# Altium PCB FPGA-Oscilloscope-route-01.PcbDoc (part 3 of 4)
Units mil, origin at the board's own origin, x right, y up, seen from the top; angles counter-clockwise.
Board outline 8300 x 5800 mil, 2 copper layers (Top Layer, Bottom Layer); 257 components, 397 nets, 1971 pads, 530 vias.
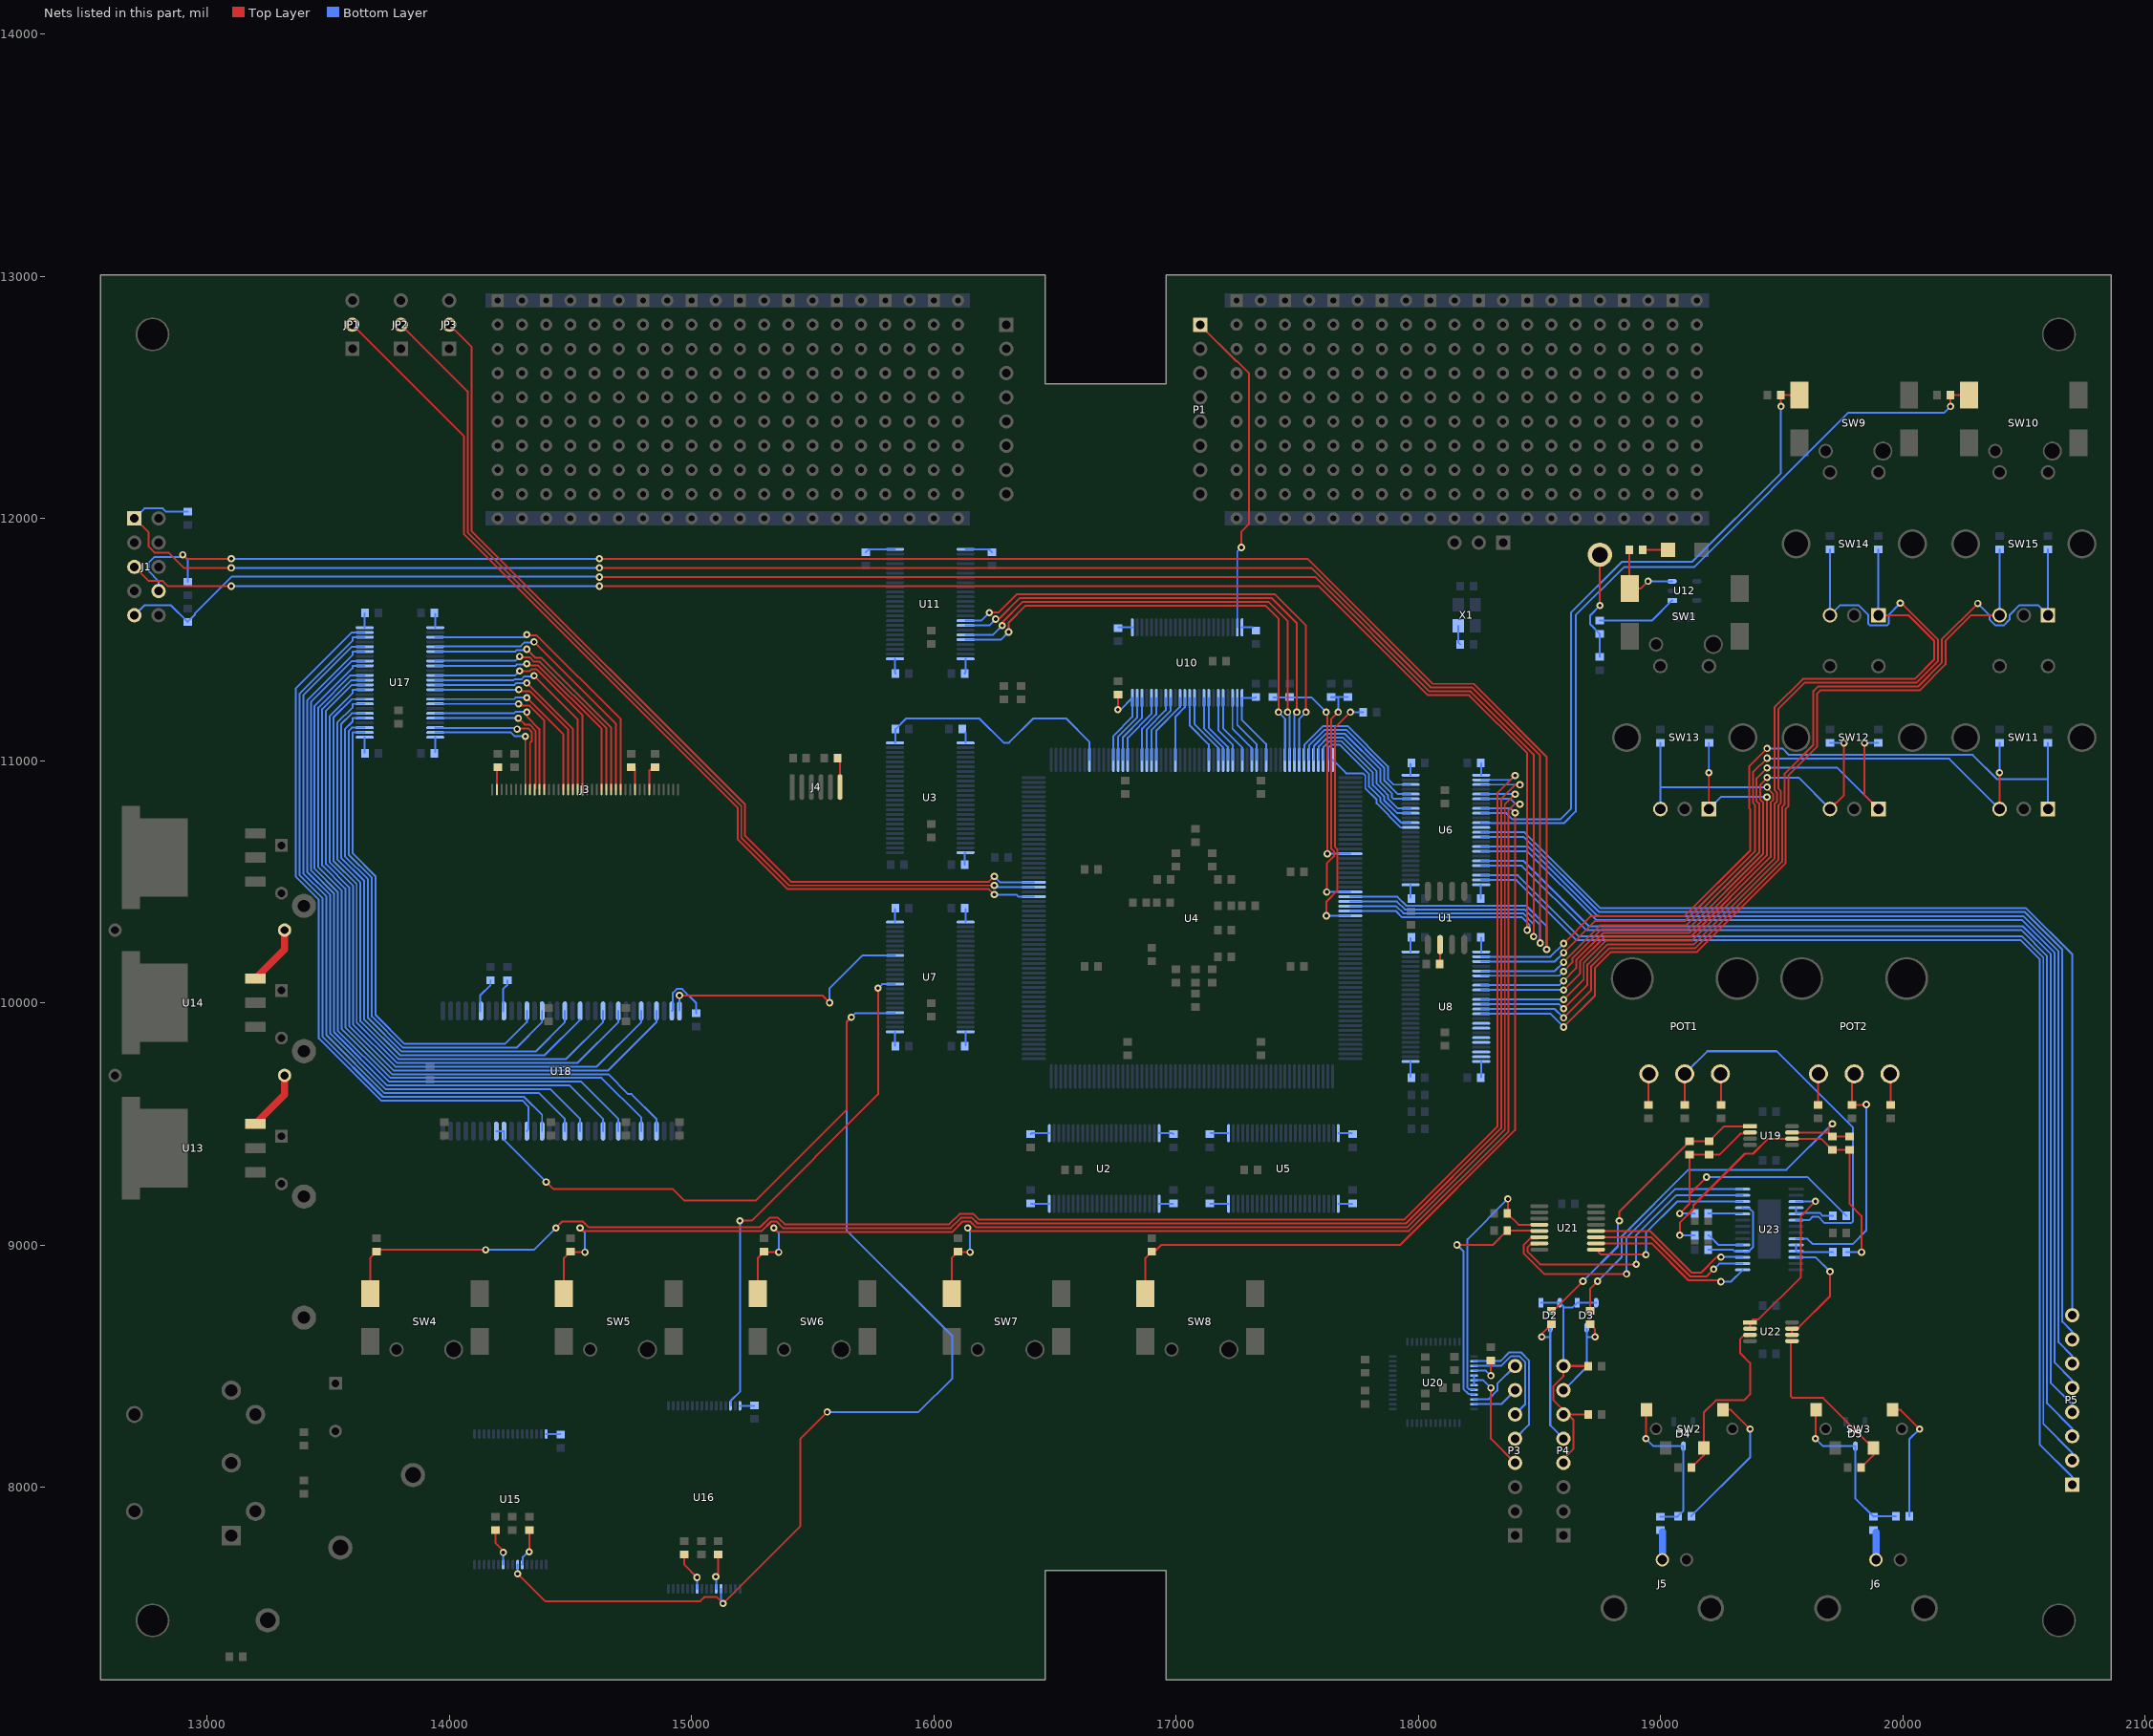
[diagram p3: the nets of this part, all layers, seen from the top]

## Via types
v1: diameter 30, hole 15, Top Layer to Bottom Layer, 530 vias

## Nets (pads, with @x,y where several pads share a name; then routed paths per layer and width w, separated by ;. In a path a pad name is that pad's centre, name@x,y a point inside that pad or via, vN(x,y) a via of type N, cw(c..) or ccw(c..) an arc to the next point about the centre after c; other vN are vias at no path point) (continued)
IO189: R14.2 U3.24 U4.189 | length 1079.3
  Bottom Layer w7.8: U3.24@15840,11077.57 U3.24@15840,11072.76 15842.44,11075.2 R14.2@15842.44,11130 15886.17,11173.73 16188.51,11173.73 16288.94,11073.3 16311.06,11073.3 16411.49,11173.73 16546.27,11173.73 16643.23,11076.77 U4.189@16643.23,11002.83
IO194: R42.2 U4.194 U10.48 | length 430.9
  Top Layer w7.8: v1(16760,11210) R42.2@16760,11272.44
  Bottom Layer w7.8: U4.194@16741.65,11002.83 16741.65,11101.65 16820,11180 U10.48@16820,11258.66 16771.34,11210 v1(16760,11210)
IO195: U4.195 U10.47 | length 288.3
  Bottom Layer w7.8: U4.195@16761.34,11002.83 16761.34,11099.28 16839.68,11177.62 U10.47@16839.68,11258.66
IO196: U4.196 U10.46 | length 288.3
  Bottom Layer w7.8: U4.196@16781.02,11002.83 16781.02,11096.9 16859.37,11175.25 U10.46@16859.37,11258.66
IO197: U4.197 U10.44 | length 296.4
  Bottom Layer w7.8: U4.197@16800.71,11002.83 16800.71,11094.52 16898.74,11192.55 U10.44@16898.74,11258.66
IO200: U4.200 U10.43 | length 280.1
  Bottom Layer w7.8: U4.200@16859.76,11002.83 16859.76,11131.52 16918.42,11190.18 U10.43@16918.42,11258.66
IO201: U4.201 U10.41 | length 288.3
  Bottom Layer w7.8: U4.201@16879.45,11002.83 16879.45,11129.14 16957.79,11207.49 U10.41@16957.79,11258.66
IO202: U4.202 U10.40 | length 288.3
  Bottom Layer w7.8: U4.202@16899.13,11002.83 16899.13,11126.76 16977.48,11205.11 U10.40@16977.48,11258.66
IO203: U4.203 U10.38 | length 296.4
  Bottom Layer w7.8: U4.203@16918.82,11002.83 16918.82,11123.92 17016.85,11221.95 U10.38@17016.85,11258.66
IO207: U4.207 U10.37 | length 272
  Bottom Layer w7.8: U4.207@16997.56,11002.83 16997.56,11180.6 17036.53,11219.58 U10.37@17036.53,11258.66
IO214: U4.214 U10.36 | length 288.6
  Bottom Layer w7.8: U10.36@17056.22,11258.66 17056.22,11146.15 17135.36,11067.01 U4.214@17135.36,11002.83
IO216: U4.216 U10.35 | length 296.8
  Bottom Layer w7.8: U10.35@17075.9,11258.66 17075.9,11150.96 17174.73,11052.14 U4.216@17174.73,11002.83
IO217: U4.217 U10.33 | length 288.6
  Bottom Layer w7.8: U10.33@17115.27,11258.66 17115.27,11133.65 17194.41,11054.52 U4.217@17194.41,11002.83
IO218: U4.218 U10.32 | length 288.6
  Bottom Layer w7.8: U10.32@17134.96,11258.66 17134.96,11136.03 17214.1,11056.89 U4.218@17214.1,11002.83
IO219: U4.219 U10.30 | length 280.5
  Bottom Layer w7.8: U10.30@17174.33,11258.66 17174.33,11125.67 17233.78,11066.22 U4.219@17233.78,11002.83
IO221: U4.221 U10.29 | length 288.6
  Bottom Layer w7.8: U10.29@17194.01,11258.66 17194.01,11133.46 17273.15,11054.32 U4.221@17273.15,11002.83
IO223: U4.223 U10.27 | length 288.6
  Bottom Layer w7.8: U10.27@17233.38,11258.66 17233.38,11131.28 17312.52,11052.14 U4.223@17312.52,11002.83
IO224: U4.224 U10.26 | length 288.6
  Bottom Layer w7.8: U10.26@17253.07,11258.66 17253.07,11146.93 17332.21,11067.79 U4.224@17332.21,11002.84
IO226: R43.2 U4.226 U10.25 | length 355.6
  Bottom Layer w7.8: R43.2@17330,11262.44 17326.22,11258.66 U10.25@17272.75,11258.66 17272.75,11167.25 17371.58,11068.42 U4.226@17371.58,11002.83
IO230: U4.230 U11.44 | length 1990.1
  Top Layer w8: v1(16309.21,11530.79) 16309.28,11530.86 16309.28,11569.28 16380,11640 17370,11640 17423.14,11586.86 v1(17423.14,11200)
  Bottom Layer w8: U11.44@16131.34,11498.74 16277.17,11498.74 v1(16309.21,11530.79) ; v1(17423.14,11200) 17423.14,11199.9 17450.32,11172.73 U4.230@17450.32,11002.83
IO231: U4.231 U11.43 | length 2004.5
  Top Layer w8: v1(16282.48,11557.52) 16282.48,11570.32 16367.96,11655.8 17382.04,11655.8 17460.94,11576.89 v1(17460.94,11200)
  Bottom Layer w8: U11.43@16131.34,11518.42 16243.39,11518.42 v1(16282.48,11557.52) ; v1(17460.94,11200) 17470,11190.94 U4.231@17470,11002.83
IO232: U4.232 U11.41 | length 2025.8
  Top Layer w8: v1(16255.76,11584.24) 16268.57,11584.24 16355.92,11671.6 17394.08,11671.6 17498.74,11566.93 v1(17498.74,11200)
  Bottom Layer w8: U11.41@16131.34,11557.8 16229.31,11557.8 v1(16255.76,11584.24) ; U4.232@17489.69,11002.83 17489.69,11190.94 v1(17498.74,11200)
IO233: U4.233 U11.40 | length 2070.2
  Top Layer w8: v1(16229.03,11610.97) 16229.1,11611.04 16267.53,11611.04 16343.88,11687.4 17406.12,11687.4 17536.54,11556.97 v1(17536.54,11200)
  Bottom Layer w8: U11.40@16131.34,11577.48 16195.54,11577.48 v1(16229.03,11610.97) ; U4.233@17509.37,11002.83 17509.37,11172.73 17536.54,11199.9 v1(17536.54,11200)
IO234: U4.234 U6.46 | length 663.9
  Bottom Layer w7.8: U4.234@17529.06,11002.83 17531.14,11004.91 17531.14,11066.11 17607.57,11142.53 17708.83,11142.53 17875.3,10976.06 17875.3,10924.14 17898.81,10900.63 U6.46@17968.66,10900.63
IO235: U4.235 U6.44 | length 646.2
  Bottom Layer w7.8: U4.235@17548.74,11002.83 17550.82,11004.91 17550.82,11063.73 17614.03,11126.93 17702.37,11126.93 17859.7,10969.6 17859.7,10917.68 17916.12,10861.26 U6.44@17968.66,10861.26
IO236: U4.236 U6.43 | length 629.4
  Bottom Layer w7.8: U4.236@17568.43,11002.83 17570.51,11004.91 17570.51,11061.35 17620.49,11111.33 17695.91,11111.33 17844.1,10963.14 17844.1,10911.21 17890.9,10864.41 17890.9,10849.1 17898.43,10841.57 U6.43@17968.66,10841.57
IO237: U4.237 U6.41 | length 611.7
  Bottom Layer w7.8: U4.237@17588.11,11002.83 17590.19,11004.91 17590.19,11058.97 17626.95,11095.73 17689.44,11095.73 17828.5,10956.68 17828.5,10904.75 17857.02,10876.23 17875.3,10857.95 17875.3,10842.64 17915.73,10802.2 U6.41@17968.66,10802.2
IO238: U4.238 U6.40 | length 585.8
  Bottom Layer w7.8: U4.238@17607.8,11002.83 17609.88,11004.91 17609.88,11056.6 17633.41,11080.13 17682.98,11080.13 17812.9,10950.22 17812.9,10898.29 17850.56,10860.63 17859.7,10851.49 17859.7,10836.18 17913.36,10782.52 U6.40@17968.66,10782.52
IO239: U4.239 U6.38 | length 568.1
  Bottom Layer w7.8: U4.239@17627.48,11002.83 17629.56,11004.91 17629.56,11054.22 17639.87,11064.53 17676.52,11064.53 17797.3,10943.75 17797.3,10891.83 17844.1,10845.03 17844.1,10829.71 17930.66,10743.15 U6.38@17968.66,10743.15
IO240: U4.240 U6.37 | length 439.9
  Bottom Layer w7.8: U4.240@17647.17,11002.83 17702.39,10947.61 17771.39,10947.61 17781.7,10937.29 17781.7,10885.37 17828.5,10838.57 17828.5,10823.25 17928.29,10723.46 U6.37@17931.95,10723.46
LOG0: P5.1 U6.23 | length 4676.7
  Bottom Layer w7.8: U6.23@18260,10506.93 18405.13,10506.93 18653.74,10258.32 20487.25,10258.32 20565.17,10180.4 20565.17,8176.52 20700,8041.7 P5.1@20700,8000
LOG1: P5.2 U6.22 | length 4597.7
  Bottom Layer w7.8: U6.22@18260,10526.61 18411.22,10526.61 18663.92,10273.92 20493.71,10273.92 20580.77,10186.86 20580.77,8260.92 20700,8141.7 P5.2@20700,8100
LOG2: P5.3 U6.20 | length 4527
  Bottom Layer w7.8: U6.20@18260,10565.98 18427.53,10565.98 18693.44,10300.08 20489.61,10300.08 20596.37,10193.32 20596.37,8345.32 20700,8241.7 P5.3@20700,8200
LOG3: P5.4 U6.19 | length 4448.1
  Bottom Layer w7.8: U6.19@18260,10585.67 18435.69,10585.67 18705.68,10315.68 20496.08,10315.68 20611.97,10199.78 20611.97,8429.72 20700,8341.7 P5.4@20700,8300
LOG4: P5.5 U6.17 | length 4377.3
  Bottom Layer w7.8: U6.17@18260,10625.04 18451.21,10625.04 18732.46,10343.78 18733.25,10343.78 18735.2,10341.84 20491.98,10341.84 20627.57,10206.24 20627.57,8514.12 20700,8441.7 P5.5@20700,8400
LOG5: P5.6 U6.16 | length 4298.4
  Bottom Layer w7.8: U6.16@18260,10644.72 18453.58,10644.72 18738.92,10359.38 18745.49,10359.38 18747.44,10357.44 20498.44,10357.44 20643.17,10212.7 20643.17,8598.52 20700,8541.7 P5.6@20700,8500
LOG6: P5.7 U6.14 | length 4227.6
  Bottom Layer w7.8: U6.14@18260,10684.09 18436.28,10684.09 18745.39,10374.98 20502.95,10374.98 20658.77,10219.17 20658.77,8682.92 20700,8641.7 P5.7@20700,8600
LOG7: P5.8 U6.13 | length 4148.7
  Bottom Layer w7.8: U6.13@18260,10703.78 18438.65,10703.78 18751.85,10390.58 20509.42,10390.58 20700,10200 P5.8@20700,8700
MSEL0: JP1.2 U4.155 | length 4104.2
  Top Layer w7.8: JP1.2@13600,12800 14060,12340 14060,11935.88 15190,10805.88 15190,10675.88 15397.08,10468.8 16227.8,10468.8 v1(16250,10446.6)
  Bottom Layer w7.8: v1(16250,10446.6) 16341.27,10446.6 16350,10437.87 U4.155@16412.91,10437.87
MSEL1: JP2.2 U4.157 | length 3992.1
  Top Layer w7.8: JP2.2@13800,12800 14075.6,12524.4 14075.6,11942.34 15205.6,10812.34 15205.6,10682.34 15403.54,10484.4 v1(16250,10484.4)
  Bottom Layer w7.8: v1(16250,10484.4) 16257.16,10477.24 U4.157@16412.91,10477.24
MSEL2: JP3.2 U4.158 | length 3906.6
  Top Layer w7.8: JP3.2@14000,12800 14091.2,12708.8 14091.2,11948.8 15221.2,10818.8 15221.2,10688.8 15410,10500 16227.8,10500 v1(16250,10522.2)
  Bottom Layer w7.8: v1(16250,10522.2) 16275.27,10496.93 U4.158@16412.91,10496.93
N\C\E\: R13.2 U4.30 | length 1042.7
  Top Layer w7.8: v1(17620.87,10359.13) 17620.87,10418.23 17667.26,10464.62 17667.26,10632.56 17656.16,10643.66 17656.16,11136.16 v1(17720,11200)
  Bottom Layer w7.8: v1(17620.87,10359.13) U4.30@17720,10359.13 ; v1(17720,11200) R13.2@17772.44,11200
N\C\O\N\F\I\G\: R20.2 R21.2 U4.25 | length 1029.9
  Top Layer w7.8: v1(17622.44,10457.56) 17622.44,10574.76 17651.66,10603.98 17651.66,10626.1 17640.56,10637.2 17640.56,11170.56 v1(17670,11200)
  Bottom Layer w7.8: v1(17622.44,10457.56) U4.25@17720,10457.56 ; v1(17670,11200) 17670,11260 17642.44,11260 R20.2@17640,11262.44 R21.2@17710,11262.44
N\S\T\A\T\U\S\: R18.2 R19.2 U4.17 | length 917.5
  Top Layer w7.8: v1(17624.96,10615.04) v1@17624.96,11195.04
  Bottom Layer w7.8: R19.2@17402.44,11260 17560,11260 v1(17620,11200) ; v1(17624.96,10615.04) U4.17@17720,10615.04
NetC56_1: C56.1 R77.1 R80.1 R81.1 U19.2 | length 1352.4
  Top Layer w8: v1(19080,9130) 19120,9170 19120,9210 ; v1(19190,9280) 19120,9210 ; U19.2@19370,9464.41 19365.07,9459.48 19329.66,9459.48 19242.62,9372.44 R77.1@19200,9372.44 C56.1@19120,9372.44 19120,9210
  Bottom Layer w8: v1(19080,9130) R81.1@19142.44,9130 ; v1(19190,9280) 19607.56,9280 R80.1@19767.56,9120
NetC56_2: C56.2 R76.1 R77.2 U19.1 | length 1216.4
  Top Layer w8: R76.1@18550,8727.56 18557.56,8727.56 v1(18680,8850) ; v1(18830,9100) 18830,9137.56 C56.2@19120,9427.56 R77.2@19200,9427.56 19262.44,9490 U19.1@19370,9490
  Bottom Layer w8: v1(18680,8850) 18824.2,8994.2 18824.2,9094.2 v1(18830,9100)
NetC57_1: C57.1 R78.1 R79.1 U19.7 | length 1710.2
  Top Layer w8: R79.1@18710,8727.56 18710,8820 v1(18740,8850) ; U19.7@19543.23,9464.41 19693.15,9464.41 ; v1(19710,9500) 19693.15,9483.15 19693.15,9464.41 ; C57.1@19780,9447.56 R78.1@19710,9447.56 19693.15,9464.41
  Bottom Layer w8: v1(18740,8850) 18840,8950 18840,9034.94 19115.06,9310 19520,9310 v1(19710,9500)
NetC57_2: C57.2 R78.2 R82.1 R83.1 U19.6 | length 1490.9
  Top Layer w8: v1(19080,9040) 19080,9092.1 19135.8,9147.9 19135.8,9163.7 19348.9,9376.8 19382.47,9376.8 19444.49,9438.82 U19.6@19543.23,9438.82 19663.62,9438.82 R78.2@19710,9392.44 C57.2@19780,9392.44 19780,9170 19830,9120 v1(19830,8970)
  Bottom Layer w8: v1(19080,9040) R83.1@19141.14,9040 ; R82.1@19767.56,8970 v1(19830,8970)
NetC59_2: C59.2 C60.2 D2.1 D2.2 D3.1 D3.2 P4.4 P4.6 P4.8 | length 1119.3
  Top Layer w8: P4.4@18600,8117.34 18641.33,8158.67 18641.33,8276.02 P4.6@18617.34,8300 ; C59.2@18702.44,8300 P4.6@18617.34,8300 ; C60.2@18702.44,8500 P4.8@18600,8500 18600,8458.45 18558.67,8417.12 18558.67,8358.67 P4.6@18617.34,8300
  Bottom Layer w8: D2.1@18505.75,8761.18 D2.2@18584.49,8761.18 18600,8745.67 ; P4.8@18600,8500 18600,8741.5 ; 18604.17,8741.5 18636.06,8741.5 D3.1@18655.75,8761.18 D3.2@18734.49,8761.18
NetC63_1: C63.1 D4.3 R84.2 SW2.1 | length 655.9
  Top Layer w8: v1(18940,8200) SW2.1@18940,8316.22
  Bottom Layer w8: v1(18940,8200) 18971.18,8168.82 D4.3@19095.12,8168.82 19095.12,7902.68 C63.1@19072.44,7880 19070,7877.56 R84.2@19000,7877.56
NetC63_2: C63.2 SW2.4 | length 605.6
  Top Layer w8: SW2.4@19257.48,8318.74 19291.26,8318.74 v1(19370,8240)
  Bottom Layer w8: C63.2@19127.56,7880 19370,8122.44 v1(19370,8240)
NetC66_1: C66.1 D5.3 R86.2 SW3.1 | length 713.5
  Top Layer w8: v1(19640,8200) 19640,8316.22 SW3.1@19642.52,8318.74
  Bottom Layer w8: v1(19640,8200) 19671.18,8168.82 D5.3@19805.12,8168.82 19805.12,7952.44 R86.2@19880,7877.56 19882.44,7880 C66.1@19972.44,7880
NetC66_2: C66.2 SW3.4 | length 522.7
  Top Layer w8: SW3.4@19957.48,8318.74 19991.26,8318.74 v1(20070,8240)
  Bottom Layer w8: C66.2@20027.56,7880 20027.56,8197.56 v1(20070,8240)
NetC75_2: C75.2 POT1.2 U23.6 | length 1635.7
  Top Layer w8: C75.2@19100,9577.56 POT1.2@19100,9706.3
  Bottom Layer w8: POT1.2@19100,9706.3 19193.7,9800 19480,9800 19795.11,9484.89 19795.11,9097.4 19788.2,9090.48 19677.42,9090.48 19651.1,9116.8 19628.9,9116.8 19614.15,9102.05 U23.6@19560,9102.05
NetC76_2: C76.2 POT2.2 U23.9 | length 1022.4
  Top Layer w8: POT2.2@19790,9696.3 C76.2@19790,9577.56 19847.56,9577.56 v1(19850,9580)
  Bottom Layer w8: U23.9@19560,9025.28 19606.82,9025.28 19628.9,9003.2 19793.2,9003.2 19850,9060 v1(19850,9580)
NetD1_2: D1.2 R49.2 | length 103.5
  Top Layer w8: R49.2@18927.56,11870 D1.2@19031.1,11870
NetD2_3: D2.3 P4.5 R76.2 | length 585.7
  Top Layer w8: v1(18510,8620) 18510,8632.44 R76.2@18550,8672.44
  Bottom Layer w8: v1(18510,8620) 18545.12,8620 ; D2.3@18545.12,8658.82 18545.12,8620 ; P4.5@18600,8200 18545.12,8254.88 18545.12,8620
NetD3_3: D3.3 P4.7 R79.2 | length 393.8
  Top Layer w8: R79.2@18710,8672.44 18730,8652.44 v1(18730,8620)
  Bottom Layer w8: P4.7@18600,8400 18695.12,8495.12 18695.12,8620 ; D3.3@18695.12,8658.82 18695.12,8620 ; v1(18730,8620) 18695.12,8620
NetJ3_2: J3.2 R62.2 | length 87.7
  Top Layer w7.8: J3.2@14195.91,10880.63 R62.2@14195.91,10968.35
NetJ3_8: J3.8 U17.23 | length 606.2
  Top Layer w7.8: J3.8@14314.02,10880.63 v1(14314.02,11100) v1@14314.02,11105.98
  Bottom Layer w7.8: U17.23@13942.28,11115.91 14254.09,11115.91 14270,11100 14308.03,11100 v1@14314.02,11105.98
NetJ3_9: J3.9 U17.22 | length 645.9
  Top Layer w7.8: v1@14285.59,11135.59 14288.5,11132.68 14325.08,11132.68 14340.72,11117.04 14340.72,11080.72 14333.7,11073.7 J3.9@14333.7,10880.63
  Bottom Layer w7.8: U17.22@13942.28,11135.59 13942.88,11134.99 14284.99,11134.99 v1@14285.59,11135.59
  other v1: 14280,11130
NetJ3_10: J3.10 U17.20 | length 675.3
  Top Layer w7.8: v1(14285.04,11174.96) 14311.72,11148.28 14331.54,11148.28 14356.32,11123.51 J3.10@14356.32,10883.56
  Bottom Layer w7.8: U17.20@13942.28,11174.96 v1(14285.04,11174.96)
NetJ3_11: J3.11 U17.19 | length 721
  Top Layer w7.8: v1(14320,11200) 14320,11181.88 14371.92,11129.97 J3.11@14371.92,10881.78
  Bottom Layer w7.8: U17.19@13942.28,11194.65 14266.96,11194.65 14273.98,11201.66 14318.34,11201.66 v1(14320,11200)
NetJ3_12: J3.12 U17.17 | length 763.4
  Top Layer w7.8: v1(14285.98,11234.02) 14293.3,11226.7 14331.06,11226.7 14392.76,11165 J3.12@14392.76,10880.63
  Bottom Layer w7.8: U17.17@13942.28,11234.02 v1(14285.98,11234.02)
NetJ3_16: J3.16 U17.16 | length 823.1
  Top Layer w7.8: v1(14320,11260) 14471.5,11108.5 J3.16@14471.5,10880.63
  Bottom Layer w7.8: U17.16@13942.28,11253.7 14267.91,11253.7 14274.92,11260.72 14319.28,11260.72 v1(14320,11260)
NetJ3_17: J3.17 U17.14 | length 863.8
  Top Layer w7.8: v1(14286.93,11293.07) 14293.3,11286.7 14331.06,11286.7 14491.18,11126.58 J3.17@14491.18,10880.63
  Bottom Layer w7.8: U17.14@13942.28,11293.07 v1(14286.93,11293.07)
NetJ3_18: J3.18 U17.13 | length 899.2
  Top Layer w7.8: v1(14320,11320) 14510.87,11129.13 J3.18@14510.87,10880.63
  Bottom Layer w7.8: U17.13@13942.28,11312.76 14268.85,11312.76 14275.87,11319.77 14319.77,11319.77 v1(14320,11320)
NetJ3_19: J3.19 U17.12 | length 959.2
  Top Layer w7.8: v1(14350,11350) 14530.55,11169.45 J3.19@14530.55,10880.63
  Bottom Layer w7.8: U17.12@13942.28,11332.44 14266.47,11332.44 14269.4,11335.37 14297.61,11335.37 14308.94,11346.7 14346.7,11346.7 v1(14350,11350)
NetJ3_20: J3.20 U17.11 | length 1003.4
  Top Layer w7.8: v1(14290,11370) 14332.24,11370 14338.94,11376.7 14361.06,11376.7 14550.24,11187.52 J3.20@14550.24,10880.63
  Bottom Layer w7.8: U17.11@13942.28,11352.13 14272.13,11352.13 v1(14290,11370)
NetJ3_24: J3.24 U17.9 | length 1051.9
  Top Layer w7.8: v1(14320,11400) 14327.7,11392.3 14367.52,11392.3 14628.98,11130.85 J3.24@14628.98,10880.63
  Bottom Layer w7.8: U17.9@13942.28,11391.5 14273.74,11391.5 14278.94,11396.7 14316.7,11396.7 v1(14320,11400)
NetJ3_25: J3.25 U17.8 | length 1089.7
  Top Layer w7.8: v1(14290,11430) 14293.3,11426.7 14331.24,11426.7 14350.04,11407.9 14373.98,11407.9 14648.66,11133.22 J3.25@14648.66,10880.63
  Bottom Layer w7.8: U17.8@13942.28,11411.18 13943.39,11412.3 14272.3,11412.3 v1(14290,11430)
NetJ3_26: J3.26 U17.6 | length 1119.3
  Top Layer w7.8: v1(14320,11460) 14356.5,11423.5 14380.44,11423.5 14668.35,11135.6 J3.26@14668.35,10880.63
  Bottom Layer w7.8: U17.6@13942.28,11450.55 14272.79,11450.55 14278.94,11456.7 14316.7,11456.7 v1(14320,11460)
NetJ3_27: J3.27 U17.5 | length 1165.3
  Top Layer w7.8: v1(14350,11490) 14688.03,11151.97 J3.27@14688.03,10880.63
  Bottom Layer w7.8: U17.5@13942.28,11470.24 13944.34,11472.3 14294.54,11472.3 14308.94,11486.7 14346.7,11486.7 v1(14350,11490)
NetJ3_28: J3.28 U17.3 | length 1204.1
  Top Layer w7.8: v1(14320,11520) 14323.3,11516.7 14361.06,11516.7 14707.72,11170.04 J3.28@14707.72,10880.63
  Bottom Layer w7.8: U17.3@13942.28,11509.61 14309.61,11509.61 v1(14320,11520)
NetJ3_31: J3.31 R67.1 | length 88.6
  Top Layer w7.8: J3.31@14766.77,10880.63 R67.1@14766.77,10969.21
NetJ3_34: J3.34 R68.1 | length 97.7
  Top Layer w7.8: J3.34@14825.83,10880.63 14825.83,10958.27 R68.1@14840,10972.44
NetJ4_6: J4.6 R72.2 | length 110.7
  Top Layer w7.8: J4.6@15613.07,10890.63 R72.2@15613.07,11001.33
NetJ5_1: J5.1 R84.1 | length 114.6
  Bottom Layer w30: J5.1@19007.87,7700 R84.1@19007.87,7814.57
NetJ6_1: J6.1 R86.1 | length 112.4
  Bottom Layer w30: J6.1@19890,7700 R86.1@19890,7812.44
NetJP9_1: JP9.1 R50.1 R55.2 | length 455.6
  Top Layer w8: v1(18750,11640) JP9.1@18750,11850
  Bottom Layer w8: R55.2@18750,11427.56 R50.1@18750,11522.44 18710,11562.44 18710,11600 v1(18750,11640)
NetP3_4: P3.4 U20.5 U20.6 U20.7 | length 473.9
  Top Layer w8: v1(18300,8410) 18300,8200 P3.4@18400,8100
  Bottom Layer w8: U20.7@18230,8421.89 U20.6@18230,8441.58 ; U20.5@18230,8461.26 U20.6@18230,8441.58 ; v1(18300,8410) 18268.42,8441.58 U20.6@18230,8441.58
NetP3_5: P3.5 U20.2 | length 603.6
  Bottom Layer w8: U20.2@18230,8520.32 18339.53,8520.32 18376.34,8557.13 18423.66,8557.13 18457.13,8523.66 18457.13,8257.13 P3.5@18400,8200
NetP3_6: P3.6 U20.3 | length 472.4
  Bottom Layer w8: U20.3@18230,8500.63 18342.18,8500.63 18382.88,8541.33 18417.12,8541.33 18441.33,8517.12 18441.33,8341.33 P3.6@18400,8300
NetP3_7: P3.7 U20.11 | length 193.5
  Bottom Layer w8: U20.11@18230,8343.15 18343.15,8343.15 P3.7@18400,8400
NetP3_8: P3.8 U20.10 | length 243.2
  Bottom Layer w8: U20.10@18230,8362.84 18290.74,8362.84 18326.8,8398.9 18326.8,8426.8 P3.8@18400,8500
NetPOT1_1: POT1.1 R89.2 | length 126.4
  Top Layer w8: R89.2@18950,9577.56 POT1.1@18950,9703.94
NetPOT1_3: POT1.3 R91.2 | length 126.4
  Top Layer w8: R91.2@19250,9577.56 POT1.3@19250,9703.94
NetPOT2_1: POT2.1 R90.2 | length 126.4
  Top Layer w8: R90.2@19650,9577.56 POT2.1@19650,9703.94
NetPOT2_3: POT2.3 R92.2 | length 126.4
  Top Layer w8: R92.2@19950,9577.56 POT2.3@19950,9703.94
NetR6_2: R6.2 U1.2 | length 77.6
  Top Layer w7.8: R6.2@18090,10162.44 U1.2@18090,10240
NetR8_1: R8.1 U2.25 | length 78.8
  Bottom Layer w7.8: R8.1@16400,9457.56 16403.78,9461.34 U2.25@16477.25,9461.34
NetR9_1: R9.1 U2.24 | length 74.8
  Bottom Layer w7.8: R9.1@16402.44,9170 U2.24@16477.25,9170
NetR10_1: R10.1 U2.48 | length 61.6
  Bottom Layer w7.8: U2.48@16930,9461.34 16986.22,9461.34 R10.1@16990,9457.56
NetR11_1: R11.1 U2.1 | length 57.6
  Bottom Layer w7.8: U2.1@16930,9170 R11.1@16987.56,9170
NetR22_1: R22.1 U3.48 | length 51.6
  Bottom Layer w7.8: R22.1@16127.56,10570 16127.56,10616.22 U3.48@16131.34,10620
NetR23_1: R23.1 U3.25 | length 43.5
  Bottom Layer w7.8: U3.25@16131.34,11072.76 R23.1@16131.34,11116.22
NetR25_1: R25.1 U5.25 | length 73.5
  Bottom Layer w7.8: R25.1@17143.78,9461.34 U5.25@17217.25,9461.34
NetR26_1: R26.1 U5.24 | length 74.8
  Bottom Layer w7.8: R26.1@17142.44,9170 U5.24@17217.25,9170
NetR27_1: R27.1 U5.48 | length 56.2
  Bottom Layer w7.8: U5.48@17670,9461.34 R27.1@17726.22,9461.34
NetR28_1: R28.1 U5.1 | length 57.6
  Bottom Layer w7.8: U5.1@17670,9170 R28.1@17727.56,9170
NetR29_1: R29.1 U6.1 | length 47.6
  Bottom Layer w7.8: U6.1@18260,10940 R29.1@18260,10987.56
NetR30_1: R30.1 U6.48 | length 46.2
  Bottom Layer w7.8: U6.48@17968.66,10940 R30.1@17968.66,10986.22
NetR31_1: R31.1 U6.24 | length 54.8
  Bottom Layer w8: R31.1@18257.56,10430 U6.24@18257.56,10484.8
NetR32_1: R32.1 U6.25 | length 53.5
  Bottom Layer w7.8: R32.1@17968.66,10433.78 U6.25@17968.66,10487.24
NetR33_1: R33.1 U7.25 | length 53.5
  Bottom Layer w7.8: U7.25@16131.34,10332.75 R33.1@16131.34,10386.22
NetR35_1: R35.1 U7.24 | length 54.8
  Bottom Layer w7.8: U7.24@15840,10332.75 R35.1@15840,10387.56
NetR36_1: R36.1 U7.48 | length 56.2
  Bottom Layer w7.8: R36.1@16131.34,9823.78 U7.48@16131.34,9880
NetR37_1: R37.1 U7.1 | length 57.6
  Bottom Layer w7.8: R37.1@15840,9822.44 U7.1@15840,9880
NetR38_1: R38.1 U8.1 | length 57.6
  Bottom Layer w7.8: U8.1@18260,10210 R38.1@18260,10267.56
NetR39_1: R39.1 U8.48 | length 56.2
  Bottom Layer w7.8: U8.48@17968.66,10210 R39.1@17968.66,10266.22
NetR40_1: R40.1 U8.24 | length 64.8
  Bottom Layer w7.8: R40.1@18260,9692.44 U8.24@18260,9757.24
NetR41_1: R41.1 U8.25 | length 63.5
  Bottom Layer w7.8: R41.1@17968.66,9693.78 U8.25@17968.66,9757.24
NetR44_1: R44.1 U10.24 | length 44.8
  Bottom Layer w7.8: U10.24@17272.75,11550 R44.1@17317.56,11550
NetR45_1: R45.1 U10.1 | length 57.6
  Bottom Layer w7.8: R45.1@16762.44,11550 U10.1@16820,11550
NetR46_2: R46.2 X1.1 | length 80
  Bottom Layer w8: X1.1@18164.57,11556.69 18164.57,11487.87 R46.2@18172.44,11480
NetR47_1: R47.1 U11.1 | length 61
  Bottom Layer w8: U11.1@15840,11420 15840,11362.44 R47.1@15842.44,11360
NetR48_1: R48.1 U11.48 | length 61.6
  Bottom Layer w8: R48.1@16127.56,11360 16131.34,11363.78 U11.48@16131.34,11420
NetR49_1: R49.1 SW1.2 U12.3 | length 345.9
  Top Layer w7.8: SW1.2@18873.62,11710.08 18918.43,11710.08 v1(18948.74,11740.39)
  Top Layer w8: SW1.2@18872.44,11711.26 R49.1@18872.44,11870
  Bottom Layer w7.8: v1(18948.74,11740.39) U12.3@19048.19,11740.39
NetR50_2: R50.2 U12.1 | length 333
  Bottom Layer w8: R50.2@18750,11577.56 18964.09,11577.56 U12.1@19048.19,11661.65
NetR51_1: R51.1 U13.3 | length 249.7
  Top Layer w30: U13.3@13200,9500 13320,9620 R51.1@13320,9700
NetR52_1: R52.1 U14.3 | length 249.7
  Top Layer w30: U14.3@13200,10100 13320,10220 R52.1@13320,10300
NetR53_1: R53.1 U11.24 | length 124.9
  Bottom Layer w8: R53.1@15720,11860.96 15731.8,11872.75 U11.24@15840,11872.75
NetR54_1: R54.1 U11.25 | length 113.5
  Bottom Layer w8: U11.25@16131.34,11872.75 16228.2,11872.75 R54.1@16240,11860.96
NetR56_1: R56.1 U15.32 | length 58.2
  Bottom Layer w7.8: U15.32@14400,8219.37 R56.1@14458.19,8219.37
NetR57_1: R57.1 U15.10 | length 156
  Top Layer w7.8: R57.1@14190,7822.44 14190,7770 v1@14222.83,7737.17
  Bottom Layer w7.8: U15.10@14222.83,7680 v1(14222.83,7730) v1@14222.83,7737.17
NetR58_1: R58.1 U15.6 | length 164.6
  Top Layer w7.8: v1(14330,7732.56) R58.1@14330,7822.44
  Bottom Layer w7.8: U15.6@14301.57,7680 14303.65,7682.08 14303.65,7711.39 14330,7737.73 v1(14330,7732.56)
NetR59_2: R59.2 U16.6 | length 130.9
  Top Layer w7.8: v1@15110,7640 R59.2@15110,7722.44
  Bottom Layer w7.8: U16.6@15101.58,7580 v1@15101.58,7628.42
  other v1: 15100,7630
NetR60_1: R60.1 U16.32 | length 58.3
  Bottom Layer w7.8: U16.32@15200,8335.91 R60.1@15258.35,8335.91
NetR61_1: R61.1 U16.10 | length 164.3
  Top Layer w7.8: R61.1@14970,7722.44 14970,7680 v1(15022.84,7627.16)
  Bottom Layer w7.8: U16.10@15022.84,7580 v1(15022.84,7627.16)
NetR63_2: R63.2 U17.25 | length 64.7
  Bottom Layer w7.8: R63.2@13650.94,11031.5 U17.25@13650.94,11096.22
NetR64_2: R64.2 U17.24 | length 61.5
  Bottom Layer w7.8: R64.2@13942.28,11034.72 U17.24@13942.28,11096.22
NetR65_2: R65.2 U17.48 | length 59.5
  Bottom Layer w7.8: U17.48@13650.94,11548.98 R65.2@13650.94,11608.5
NetR66_2: R66.2 U17.1 | length 56.3
  Bottom Layer w7.8: U17.1@13942.28,11548.98 R66.2@13942.28,11605.28
NetR69_1: R69.1 U18.63 | length 246.3
  Bottom Layer w8: U18.63@14918.5,9966.06 14923.2,9970.76 14923.2,10041.1 14938.9,10056.8 14961.1,10056.8 15017.9,10000 15020,10000 R69.1@15020,9957.56
NetR70_1: R70.1 U18.41 | length 135.6
  Bottom Layer w7.8: U18.41@14221.73,9964.41 14221.73,10056.3 14240,10074.57 R70.1@14240,10092.44
NetR71_1: R71.1 U18.38 | length 145.7
  Bottom Layer w7.8: U18.38@14127.24,9964.41 14127.24,10029.68 14170,10072.44 R71.1@14170,10092.44
NetR73_2: R73.2 U20.8 U21.4 | length 1088.3
  Top Layer w8: R73.2@18367.56,9130 18414.33,9083.23 U21.4@18500,9083.23 ; R73.2@18370,9132.44 v1(18370,9190)
  Bottom Layer w8: U20.8@18230,8402.21 18227.04,8405.17 18209.36,8405.17 18202.45,8412.08 18202.45,8537.76 18202.45,8570.86 18203.47,8571.88 18203.47,9023.47 v1(18370,9190)
NetR74_2: R74.2 U20.9 U21.5 | length 1021.7
  Top Layer w8: v1(18160,9000) 18307.56,9000 R74.2@18367.56,9060 U21.5@18497.64,9060
  Bottom Layer w8: v1(18160,9000) 18187.67,8972.33 18187.67,8578.42 18186.65,8577.41 18186.65,8544.31 18186.65,8405.54 18206.7,8385.48 18227.04,8385.48 U20.9@18230,8382.52
NetR75_2: R75.2 U20.4 | length 141.1
  Top Layer w8: v1(18300,8460) R75.2@18300,8522.44
  Bottom Layer w8: U20.4@18230,8480.95 18279.05,8480.95 v1(18300,8460)
NetR80_2: R80.2 U23.4 U23.5 | length 185.3
  Bottom Layer w8: U23.4@19560,9153.23 U23.5@19560,9127.64 19564.96,9132.6 19657.65,9132.6 19670.25,9120 R80.2@19712.44,9120
NetR81_2: R81.2 U23.24 | length 139.6
  Bottom Layer w8: R81.2@19197.56,9130 U23.24@19337.17,9130
NetR82_2: R82.2 U23.10 U23.11 | length 179.7
  Bottom Layer w8: U23.10@19560,8999.68 U23.11@19560,8974.09 19564.09,8970 R82.2@19712.44,8970
NetR83_2: R83.2 U23.19 | length 158.1
  Bottom Layer w8: R83.2@19197.56,9038.7 19201.3,9038.7 19240,9000 19339.21,9000 U23.19@19339.53,8999.68
NetR85_1: R85.1 SW2.3 U22.3 | length 757.2
  Top Layer w8: R85.1@19127.56,8080 19178.74,8131.18 SW2.3@19178.74,8161.26 19178.74,8307.87 19228.97,8358.1 19344.79,8358.1 19370,8383.31 19370,8512.1 19329.66,8552.44 19329.66,8611.79 19341.76,8623.89 U22.3@19365.07,8623.89
NetR87_1: R87.1 SW3.3 U22.5 | length 761.8
  Top Layer w8: U22.5@19543.23,8603.23 19538.2,8598.2 19538.2,8375.11 19545.11,8368.2 19671.8,8368.2 SW3.3@19878.74,8161.26 19878.74,8131.18 R87.1@19827.56,8080
NetR88_1: R88.1 U23.18 U23.25 | length 382.6
  Bottom Layer w8: R88.1@19197.56,8980 19300,8980 19305.91,8974.09 U23.18@19339.53,8974.09 ; U23.25@19339.53,9153.23 19342.76,9150 19367.8,9150 19382.82,9134.97 19382.82,8992.35 19360.47,8970 U23.18@19347.41,8970
NetU21_6: U21.6 U23.28 | length 1285.2
  Top Layer w8: U21.6@18500,9032.05 18494.08,9026.13 18462.32,9026.13 18435,8998.81 18435,8965 18520,8880 v1(18860,8880)
  Bottom Layer w8: v1(18860,8880) 18860,9030 19060,9230 U23.28@19339.53,9230
NetU21_7: U21.7 U23.27 | length 1171.4
  Top Layer w8: U21.7@18500,9006.46 18494.08,9000.54 18462.32,9000.54 18450.8,8989.02 18450.8,8972.72 18503.52,8920 v1(18900,8920)
  Bottom Layer w8: v1(18900,8920) 18900,9040 19064.41,9204.41 U23.27@19339.53,9204.41
NetU21_9: U21.9 U23.26 | length 757.3
  Top Layer w8: U21.9@18734.25,8980.87 18755.12,8960 v1(18940,8960)
  Bottom Layer w8: v1(18940,8960) 18940,9050 19068.82,9178.82 U23.26@19339.53,9178.82
NetU21_10: U21.10 U23.15 | length 691.3
  Top Layer w8: U21.10@18734.25,9006.46 18963.54,9006.46 19115.96,8854.04 19244.04,8854.04 v1(19250,8848.08)
  Bottom Layer w8: v1(19250,8848.08) 19290.29,8848.08 U23.15@19339.53,8897.32
NetU21_11: U21.11 U23.16 | length 694.4
  Top Layer w8: U21.11@18734.25,9032.05 18960.3,9032.05 19122.5,8869.84 19189.84,8869.84 v1(19220,8900)
  Bottom Layer w8: v1(19220,8900) 19242.91,8922.91 U23.16@19339.53,8922.91
NetU21_12: U21.12 U23.17 | length 701.7
  Top Layer w8: U21.12@18734.25,9057.64 18734.49,9057.4 18957.29,9057.4 19129.05,8885.64 19167.58,8885.64 19231.94,8950 v1(19250,8950)
  Bottom Layer w8: v1(19250,8950) U23.17@19338.03,8950
NetU22_1: U22.1 U22.2 U23.3 | length 731
  Top Layer w8: U22.2@19370,8654.41 U22.1@19370,8680 19381.48,8691.48 19403.79,8691.48 19580,8867.69 19580,9120 v1(19640,9180)
  Bottom Layer w8: U23.3@19560,9178.82 19561.18,9180 v1(19640,9180)
NetU22_6: U22.6 U22.7 U23.12 | length 504
  Top Layer w8: U22.6@19543.23,8628.82 U22.7@19543.23,8654.41 19548.16,8659.34 19571.47,8659.34 19700,8787.87 v1(19700,8890)
  Bottom Layer w8: U23.12@19560,8948.5 19641.5,8948.5 v1(19700,8890)
R/W\: U7.5 U15.7 U16.5 U18.24 U18.25 | length 6555.5
  Top Layer w7.8: v1(14281.89,7641.89) 14395.09,7528.69 15036.62,7528.69 15054.64,7546.7 15103.3,7546.7 v1(15130,7520) 15450,7840 15450,8200 v1(15560,8310) ; v1(14400,9260) 14430,9230 14923.49,9230 14970.19,9183.3 15265.26,9183.3 15640,9558.04 15640,9920 v1(15660,9940)
  Bottom Layer w7.8: U18.25@14194.09,9470 U18.24@14225.59,9470 14225.59,9434.41 v1(14400,9260) ; v1(14281.89,7641.89) U15.7@14281.89,7680 ; U16.5@15121.26,7580 15121.26,7528.74 v1(15130,7520) ; v1(15560,8310) 15937.13,8310 16076.7,8449.57 16076.7,8623.3 15640,9060 15640,9920 15677.7,9957.7 15836.44,9957.7 U7.5@15838.74,9960
ROT0A: R109.1 SW11.1 U8.2 | length 3227.6
  Top Layer w7.8: v1(18600,10244.66) 18712.78,10357.44 19100,10357.44 19370,10627.44 19370,10800 19365.94,10804.06 19365.94,10975.94 v1(19440,11050)
  Bottom Layer w7.8: U8.2@18260,10190.31 18545.65,10190.31 v1(18600,10244.66) ; v1(19440,11050) 19503.6,11050 19530.3,11023.3 20288.94,11023.3 20388.94,10923.3 20596.7,10923.3 ; SW11.1@20600,10800 R109.1@20600,11072.44
ROT0B: R108.1 SW11.3 U8.3 | length 3049.9
  Top Layer w7.8: v1(18600,10206.86) 18730.89,10337.75 19102.38,10337.75 19389.68,10625.06 19389.68,10817.31 19381.54,10825.45 19381.54,10951.54 v1(19440,11010) ; SW11.3@20400,10800 v1(20400,10950)
  Bottom Layer w7.8: U8.3@18260,10170.63 18563.77,10170.63 v1(18600,10206.86) ; v1(19440,11010) 19442.3,11007.7 20192.3,11007.7 SW11.3@20400,10800 ; v1(20400,10950) R108.1@20400,11072.44
ROT1A: R107.1 SW12.1 U8.5 | length 2607.3
  Top Layer w7.8: v1(18600,10167.49) 18600,10169.1 18750.1,10319.2 19105.89,10319.2 19408.24,10621.55 19408.24,10820.81 19397.14,10831.91 19397.14,10927.14 v1(19440,10970) ; v1(19842.44,11072.44) 19842.44,10857.56 SW12.1@19900,10800
  Bottom Layer w7.8: U8.5@18260,10131.26 18563.77,10131.26 v1(18600,10167.49) ; v1(19440,10970) 19730,10970 SW12.1@19900,10800 ; v1(19842.44,11072.44) R107.1@19900,11072.44
ROT1B: R106.1 SW12.3 U8.6 | length 2381.1
  Top Layer w7.8: v1(18600,10129.69) 18636.4,10166.09 18636.4,10183.44 18756.56,10303.6 19112.35,10303.6 19423.84,10615.09 19423.84,10827.28 19412.74,10838.38 19412.74,10900.5 19440,10927.76 v1(19440,10930) ; SW12.3@19700,10800 19757.56,10857.56 v1(19757.56,11072.44)
  Bottom Layer w7.8: U8.6@18260,10111.57 18581.88,10111.57 v1(18600,10129.69) ; v1(19440,10930) 19570,10930 SW12.3@19700,10800 ; R106.1@19700,11072.44 v1(19757.56,11072.44)
ROT2A: R105.1 SW13.1 U8.8 | length 2195.1
  Top Layer w7.8: v1(18600,10090.32) 18652,10142.32 18652,10176.98 18763.02,10288 19118.81,10288 19439.44,10608.63 v1(19439.44,10849.44) ; SW13.1@19200,10800 v1(19200,10950)
  Bottom Layer w7.8: U8.8@18260,10072.2 18581.88,10072.2 v1(18600,10090.32) ; SW13.1@19200,10800 19249.44,10849.44 v1(19439.44,10849.44) ; v1(19200,10950) R105.1@19200,11072.44
ROT2B: R104.1 SW13.3 U8.9 | length 2467.9
  Top Layer w7.8: v1(18600,10052.52) 18667.6,10120.12 18667.6,10170.52 18769.48,10272.4 19125.27,10272.4 19455.04,10602.16 19455.04,10827.28 19466.14,10838.38 19466.14,10860.5 19440,10886.63 v1(19440,10890)
  Bottom Layer w7.8: U8.9@18260,10052.52 v1(18600,10052.52) ; SW13.3@19000,10800 19000,10890 ; R104.1@19000,11072.44 19000,10890 ; v1(19440,10890) 19000,10890
ROT3A: R103.1 SW14.1 U8.11 | length 3488.9
  Top Layer w7.8: v1(18600,10013.15) 18683.2,10096.35 18683.2,10164.05 18775.95,10256.8 19131.73,10256.8 19470.64,10595.7 19470.64,10820.81 19481.74,10831.91 19481.74,10866.96 19470.64,10878.06 19470.64,11219.39 19588.05,11336.8 20050,11336.8 20130,11416.8 20130,11493.54 20023.54,11600 SW14.1@19900,11600
  Bottom Layer w7.8: U8.11@18260,10013.15 v1(18600,10013.15) ; SW14.1@19900,11600 R103.1@19900,11872.44
ROT3B: R102.1 SW14.3 U8.12 | length 3912.8
  Top Layer w7.8: v1(18600,9975.35) 18698.8,10074.15 18698.8,10157.59 18782.41,10241.2 19138.2,10241.2 19486.24,10589.24 19486.24,10814.35 19497.34,10825.45 19497.34,10873.42 19486.24,10884.52 19486.24,11212.92 19594.51,11321.2 20056.46,11321.2 20145.6,11410.34 20145.6,11500 19995.6,11650 v1(19990,11650)
  Bottom Layer w7.8: U8.12@18260,9993.46 18581.89,9993.46 v1(18600,9975.35) ; R102.1@19700,11872.44 SW14.3@19700,11600 19741.7,11641.7 19817.27,11641.7 19858.3,11600.67 19858.3,11565.15 19865.15,11558.3 19934.85,11558.3 19941.7,11565.15 19941.7,11601.7 v1(19990,11650)
ROT4A: R101.1 SW15.1 U8.13 | length 3897.5
  Top Layer w7.8: v1(18600,9937.55) 18714.4,10051.95 18714.4,10151.13 18788.87,10225.6 19144.66,10225.6 19501.84,10582.78 19501.84,10807.89 19512.94,10818.99 19512.94,10946.54 19631.7,11065.3 19631.7,11287.3 19650,11305.6 20062.92,11305.6 20161.2,11403.88 20161.2,11500 v1(20310,11648.8)
  Bottom Layer w7.8: U8.13@18260,9973.78 18563.77,9973.78 v1(18600,9937.55) ; v1(20310,11648.8) 20358.3,11600.5 20358.3,11582.73 20382.73,11558.3 20417.27,11558.3 20441.7,11582.73 20441.7,11600.67 20482.73,11641.7 20558.3,11641.7 SW15.1@20600,11600 R101.1@20600,11872.44
ROT4B: R100.1 SW15.3 U8.14 | length 3598.2
  Top Layer w7.8: v1(18600,9899.75) 18730,10029.75 18730,10144.67 18795.33,10210 19151.12,10210 19517.44,10576.32 19517.44,10801.43 19528.54,10812.53 19528.54,10940.08 19647.3,11058.84 19647.3,11277.3 19660,11290 20069.39,11290 20176.8,11397.41 20176.8,11493.54 20283.26,11600 SW15.3@20400,11600
  Bottom Layer w7.8: U8.14@18260,9954.09 18346.52,9954.09 18347.44,9955.01 18544.74,9955.01 v1(18600,9899.75) ; SW15.3@20400,11600 R100.1@20400,11872.44
SC: U7.17 U18.64 | length 1080.1
  Top Layer w7.8: v1(14950,10030) 15540,10030 v1(15570,10000)
  Bottom Layer w7.8: U18.64@14950,9968.27 v1(14950,10030) ; v1(15570,10000) 15570,10060 15704.96,10194.96 U7.17@15840,10194.96
SDQB0: U17.37 U18.4 | length 3070.5
  Bottom Layer w7.8: U17.37@13650.94,11332.44 13595.25,11332.44 13475.2,11212.4 13475.2,10566.49 13570.9,10470.79 13570.9,9898.31 13764.01,9705.2 14657.04,9705.2 14738.94,9623.3 14752.21,9623.3 14855.51,9520 U18.4@14855.51,9470
SDQB1: U17.38 U18.6 | length 3057.5
  Bottom Layer w7.8: U17.38@13650.94,11352.13 13592.87,11352.13 13459.6,11218.86 13459.6,10560.03 13555.3,10464.33 13555.3,9891.84 13757.54,9689.6 14628.16,9689.6 14792.52,9525.24 U18.6@14792.52,9470
SDQB2: U17.40 U18.9 | length 3021
  Bottom Layer w7.8: U17.40@13650.94,11391.5 13600,11391.5 13600,11381.32 13444,11225.32 13444,10553.57 13539.7,10457.87 13539.7,9885.38 13751.08,9674 14544.03,9674 14698.03,9520 U18.9@14698.03,9470
SDQB3: U17.41 U18.11 | length 3004.9
  Bottom Layer w7.8: U17.41@13650.94,11411.18 13597.62,11411.18 13428.4,11241.96 13428.4,10547.1 13524.1,10451.4 13524.1,9878.92 13744.62,9658.4 14496.64,9658.4 14635.04,9520 U18.11@14635.04,9470
SDQB4: U17.43 U18.14 | length 2974.3
  Bottom Layer w7.8: U17.43@13650.94,11450.55 13600,11450.55 13600,11435.62 13412.8,11248.42 13412.8,10540.64 13508.5,10444.94 13508.5,9872.46 13738.16,9642.8 14417.75,9642.8 14540.55,9520 U18.14@14540.55,9470
SDQB5: U17.44 U18.16 | length 2958.2
  Bottom Layer w7.8: U17.44@13650.94,11470.24 13597.62,11470.24 13397.2,11269.82 13397.2,10534.18 13492.9,10438.48 13492.9,9866 13731.7,9627.2 14370.36,9627.2 14477.56,9520 U18.16@14477.56,9470
SDQB6: U17.46 U18.19 | length 2937.3
  Bottom Layer w7.8: U17.46@13650.94,11509.61 13600,11509.61 13600,11494.68 13381.6,11276.28 13381.6,10527.72 13477.3,10432.02 13477.3,9859.54 13725.24,9611.6 14308.22,9611.6 14383.07,9536.75 U18.19@14383.07,9470
SDQB7: U17.47 U18.21 | length 2950.7
  Bottom Layer w7.8: U17.47@13650.94,11529.29 13597.62,11529.29 13366,11297.67 13366,10521.26 13461.7,10425.56 13461.7,9853.07 13718.77,9596 14301.76,9596 14326.7,9571.06 14326.7,9476.62 U18.21@14320.08,9470
SDQB8: U17.26 U18.44 | length 2013.9
  Bottom Layer w7.8: U17.26@13650.94,11115.91 13600,11115.91 13600,10618.18 13695.7,10522.48 13695.7,9950 13815.7,9830 14230.08,9830 14320.08,9920 U18.44@14320.08,9966.06
SDQB9: U17.27 U18.46 | length 2136.8
  Bottom Layer w7.8: U17.27@13650.94,11135.59 13597.62,11135.59 13584.4,11122.37 13584.4,10611.72 13680.1,10516.02 13680.1,9943.54 13809.24,9814.4 14277.47,9814.4 14383.07,9920 U18.46@14383.07,9966.06
SDQB10: U17.29 U18.49 | length 2308
  Bottom Layer w7.8: U17.29@13650.94,11174.96 13600,11174.96 13600,11160.03 13568.8,11128.83 13568.8,10605.26 13664.5,10509.56 13664.5,9937.08 13802.78,9798.8 14356.36,9798.8 14477.56,9920 U18.49@14477.56,9966.06
SDQB11: U17.30 U18.51 | length 2389.1
  Bottom Layer w7.8: U17.30@13650.94,11194.65 13597.62,11194.65 13553.2,11150.23 13553.2,10598.8 13648.9,10503.1 13648.9,9930.61 13796.31,9783.2 14393.2,9783.2 U18.51@14540.55,9930.55
SDQB12: U17.32 U18.54 | length 2602.1
  Bottom Layer w7.8: U17.32@13650.94,11234.02 13600,11234.02 13600,11219.09 13537.6,11156.69 13537.6,10592.34 13633.3,10496.64 13633.3,9924.15 13789.85,9767.6 14482.64,9767.6 14635.04,9920 U18.54@14635.04,9966.06
SDQB13: U17.33 U18.56 | length 2724.9
  Bottom Layer w7.8: U17.33@13650.94,11253.7 13597.62,11253.7 13522,11178.08 13522,10585.87 13617.7,10490.17 13617.7,9917.69 13783.39,9752 14530.03,9752 14698.03,9920 U18.56@14698.03,9966.06
SDQB14: U17.35 U18.59 | length 2896.1
  Bottom Layer w7.8: U17.35@13650.94,11293.07 13600,11293.07 13600,11278.14 13506.4,11184.54 13506.4,10579.41 13602.1,10483.71 13602.1,9911.23 13776.93,9736.4 14608.92,9736.4 14792.52,9920 U18.59@14792.52,9966.06
SDQB15: U17.36 U18.61 | length 3019
  Bottom Layer w7.8: U17.36@13650.94,11312.76 13597.62,11312.76 13490.8,11205.94 13490.8,10572.95 13586.5,10477.25 13586.5,9904.77 13770.47,9720.8 14656.31,9720.8 14855.51,9920 U18.61@14855.51,9966.06
SRAMC\S\: U7.11 U16.30 | length 2078.7
  Top Layer w7.8: v1(15200,9100) 15248.15,9100 15770,9621.85 v1(15770,10060)
  Bottom Layer w7.8: U16.30@15162.71,8337.99 15162.71,8356.98 15200,8394.27 v1(15200,9100) ; v1(15770,10060) 15786.85,10076.85 U7.11@15840,10076.85
SW0: R99.1 SW4.2 U6.2 | length 6703.3
  Top Layer w7.8: SW4.2@13673.62,8798.43 13673.62,8946.06 R99.1@13700,8972.44 ; R99.1@13707.56,8980 v1(14150,8980) ; v1(14440,9070) 14466.7,9096.7 14551.06,9096.7 14574.46,9073.3 15283.48,9073.3 15322.48,9112.3 15357.52,9112.3 15384.36,9085.46 16063.77,9085.46 16106.21,9127.9 16163.98,9127.9 16187.48,9104.4 17942.16,9104.4 18326.5,9488.74 18326.5,10864.89 v1(18400,10938.43)
  Bottom Layer w7.8: v1(14150,8980) 14350,8980 v1(14440,9070) ; U6.2@18260,10920.31 18381.88,10920.31 v1(18400,10938.43)
SW1: R98.1 SW5.2 U6.3 | length 5998.1
  Top Layer w7.8: SW5.2@14473.62,8798.43 14473.62,8946.06 R98.1@14500,8972.44 14502.44,8970 v1(14560,8970) ; v1(14540,9070) 14552.3,9057.7 15289.94,9057.7 15328.94,9096.7 15351.06,9096.7 15377.9,9069.86 16070.23,9069.86 16112.67,9112.3 16157.52,9112.3 16181.02,9088.8 17948.62,9088.8 18342.1,9482.28 18342.1,10841.12 18400,10899.02 v1@18419.02,10899.02
  Bottom Layer w7.8: v1(14540,9070) 14560,9050 v1(14560,8970) ; U6.3@18260,10900.63 v1@18419.37,10900.63
  other v1: 18420,10900
SW2: R97.1 SW6.2 U6.5 | length 5115.5
  Top Layer w7.8: SW6.2@15273.62,8798.43 15273.62,8946.06 R97.1@15300,8972.44 15302.44,8970 v1(15360,8970) ; v1(15340,9070) 15355.74,9054.26 16076.69,9054.26 16119.13,9096.7 16151.06,9096.7 16174.56,9073.2 17955.08,9073.2 18357.7,9475.82 18357.7,10818.92 v1@18400,10861.22
  Bottom Layer w7.8: v1(15340,9070) 15360,9050 v1(15360,8970) ; U6.5@18260,10861.26 v1(18400,10861.26)
SW3: R96.1 SW7.2 U6.6 | length 4291.4
  Top Layer w7.8: SW7.2@16073.62,8798.43 16073.62,8946.06 R96.1@16100,8972.44 ; R96.1@16102.44,8970 v1(16150,8970) ; v1(16140,9070) 16152.4,9057.6 17961.54,9057.6 18373.3,9469.36 18373.3,10795.15 18400,10821.85 v1@18418.15,10821.85
  Bottom Layer w7.8: v1(16140,9070) 16150,9060 v1(16150,8970) ; U6.6@18260,10841.57 18381.89,10841.57 18400,10823.46 v1@18416.54,10823.46
  other v1: 18420,10820
SW4: R95.1 SW8.2 U6.8 | length 3338
  Top Layer w7.8: SW8.2@16873.62,8798.43 16873.62,8946.06 R95.1@16900,8972.44 ; R95.1@16912.33,8972.44 16940,9000.11 17926.12,9000.11 18400,9473.99 v1(18400,10784.09)
  Bottom Layer w7.8: U6.8@18260,10802.2 18381.89,10802.2 v1(18400,10784.09)
SW5: R94.1 SW9.2 U6.9 | length 2711.8
  Top Layer w7.8: v1(19497.56,12462.44) R94.1@19497.56,12510 SW9.2@19572.05,12510
  Bottom Layer w7.8: U6.9@18260,10782.52 18363.81,10782.52 18388.94,10757.39 18587.39,10757.39 18630,10800 18630,11610 18840,11820 19130,11820 19497.56,12187.56 v1(19497.56,12462.44)
SW6: R93.1 SW10.2 U6.11 | length 3247.4
  Top Layer w7.8: v1(20197.56,12462.44) R93.1@20197.56,12510 SW10.2@20272.05,12510
  Bottom Layer w7.8: U6.11@18260,10743.15 18261.36,10741.79 18601.79,10741.79 18650,10790 18650,11600 18850,11800 19140,11800 19776.7,12436.7 20171.82,12436.7 v1(20197.56,12462.44)
SW7: U6.12
SW8: U8.16
SW9: U8.17
SW10: U8.19
SW11: U8.20
SW12: U8.22
SW13: U8.23
TCK: J1.1 R7.2 U4.27 | length 8158.1
  Top Layer w7.8: J1.1@12700,12000 12758.77,11941.23 12758.77,11882.92 12782.92,11858.77 12841.23,11858.77 12904.4,11795.6 v1(13100,11795.6) ; v1(14620,11795.6) 17558.52,11795.6 18052.92,11301.2 18222.92,11301.2 18503.46,11020.67 v1(18503.46,10246.54)
  Bottom Layer w7.8: J1.1@12700,12000 12741.23,12041.23 12817.08,12041.23 12830.74,12027.56 R7.2@12920,12027.56 ; v1(13100,11795.6) v1(14620,11795.6) ; U4.27@17720,10418.19 17912.18,10418.19 17945.38,10384.98 18439.14,10384.98 18503.46,10320.67 v1(18503.46,10246.54)
TDI: J1.9 R1.1 U4.26 | length 8126
  Top Layer w7.8: v1(12900,11850) 12916.6,11833.4 v1(13100,11833.4) ; v1(14620,11833.4) 17542.79,11833.4 18059.39,11316.8 18229.39,11316.8 18530.19,11016 v1(18530.19,10219.81)
  Bottom Layer w7.8: J1.9@12800,11700 12800,11741.7 12758.77,11782.92 12758.77,11817.08 12782.92,11841.23 v1@12891.23,11841.23 ; v1(12900,11850) 12920,11830 R1.1@12920,11737.56 ; v1(13100,11833.4) v1(14620,11833.4) ; U4.26@17720,10437.87 17914.56,10437.87 17951.85,10400.58 18445.6,10400.58 18530.19,10316 v1(18530.19,10219.81)
TDO: J1.3 U4.29 | length 7587.4
  Top Layer w7.8: J1.3@12700,11800 12758.77,11741.23 12817.08,11741.23 12838.3,11720 v1(13100,11720) ; v1(14620,11720) 17590,11720 18040,11270 18210,11270 18450,11030 v1(18450,10300)
  Bottom Layer w7.8: v1(13100,11720) v1(14620,11720) ; U4.29@17720,10378.82 17907.43,10378.82 17932.46,10353.78 18426.22,10353.78 18460,10320 18460,10310 v1(18450,10300)
TMS: J1.5 R2.1 U4.28 | length 7797.7
  Top Layer w7.8: v1(14620,11757.8) 17574.26,11757.8 18046.46,11285.6 18216.46,11285.6 18476.73,11025.33 v1(18476.73,10273.27)
  Bottom Layer w7.8: J1.5@12700,11600 12741.23,11641.23 12851.21,11641.23 R2.1@12920,11572.44 12949.42,11601.86 12949.42,11607.18 13102.24,11760 v1@14620,11760 ; U4.28@17720,10398.5 17909.8,10398.5 17938.92,10369.38 18432.68,10369.38 18476.73,10325.33 v1(18476.73,10273.27)
UB0: P1.1 U10.23 | length 1354.5
  Top Layer w7.8: P1.1@17100,12798.1 17248.1,12650 17251.9,12650 17302.3,12599.6 17302.3,11978.34 17270,11946.04 v1(17270,11880)
  Bottom Layer w7.8: U10.23@17253.07,11550 17253.07,11863.07 v1(17270,11880)